# Altium PCB Tigershark 3D R1.3.PcbDoc (part 1 of 3)
Units mm, origin at the board's own origin, x right, y up, seen from the top; angles counter-clockwise.
Board outline 142.49 x 111.76 mm, 4 copper layers (Top Layer, Groun Plane, Power Plane, Bottom Layer); 253 components, 276 nets, 982 pads, 750 vias.
Unrouted connection lines stored in the file: 262.
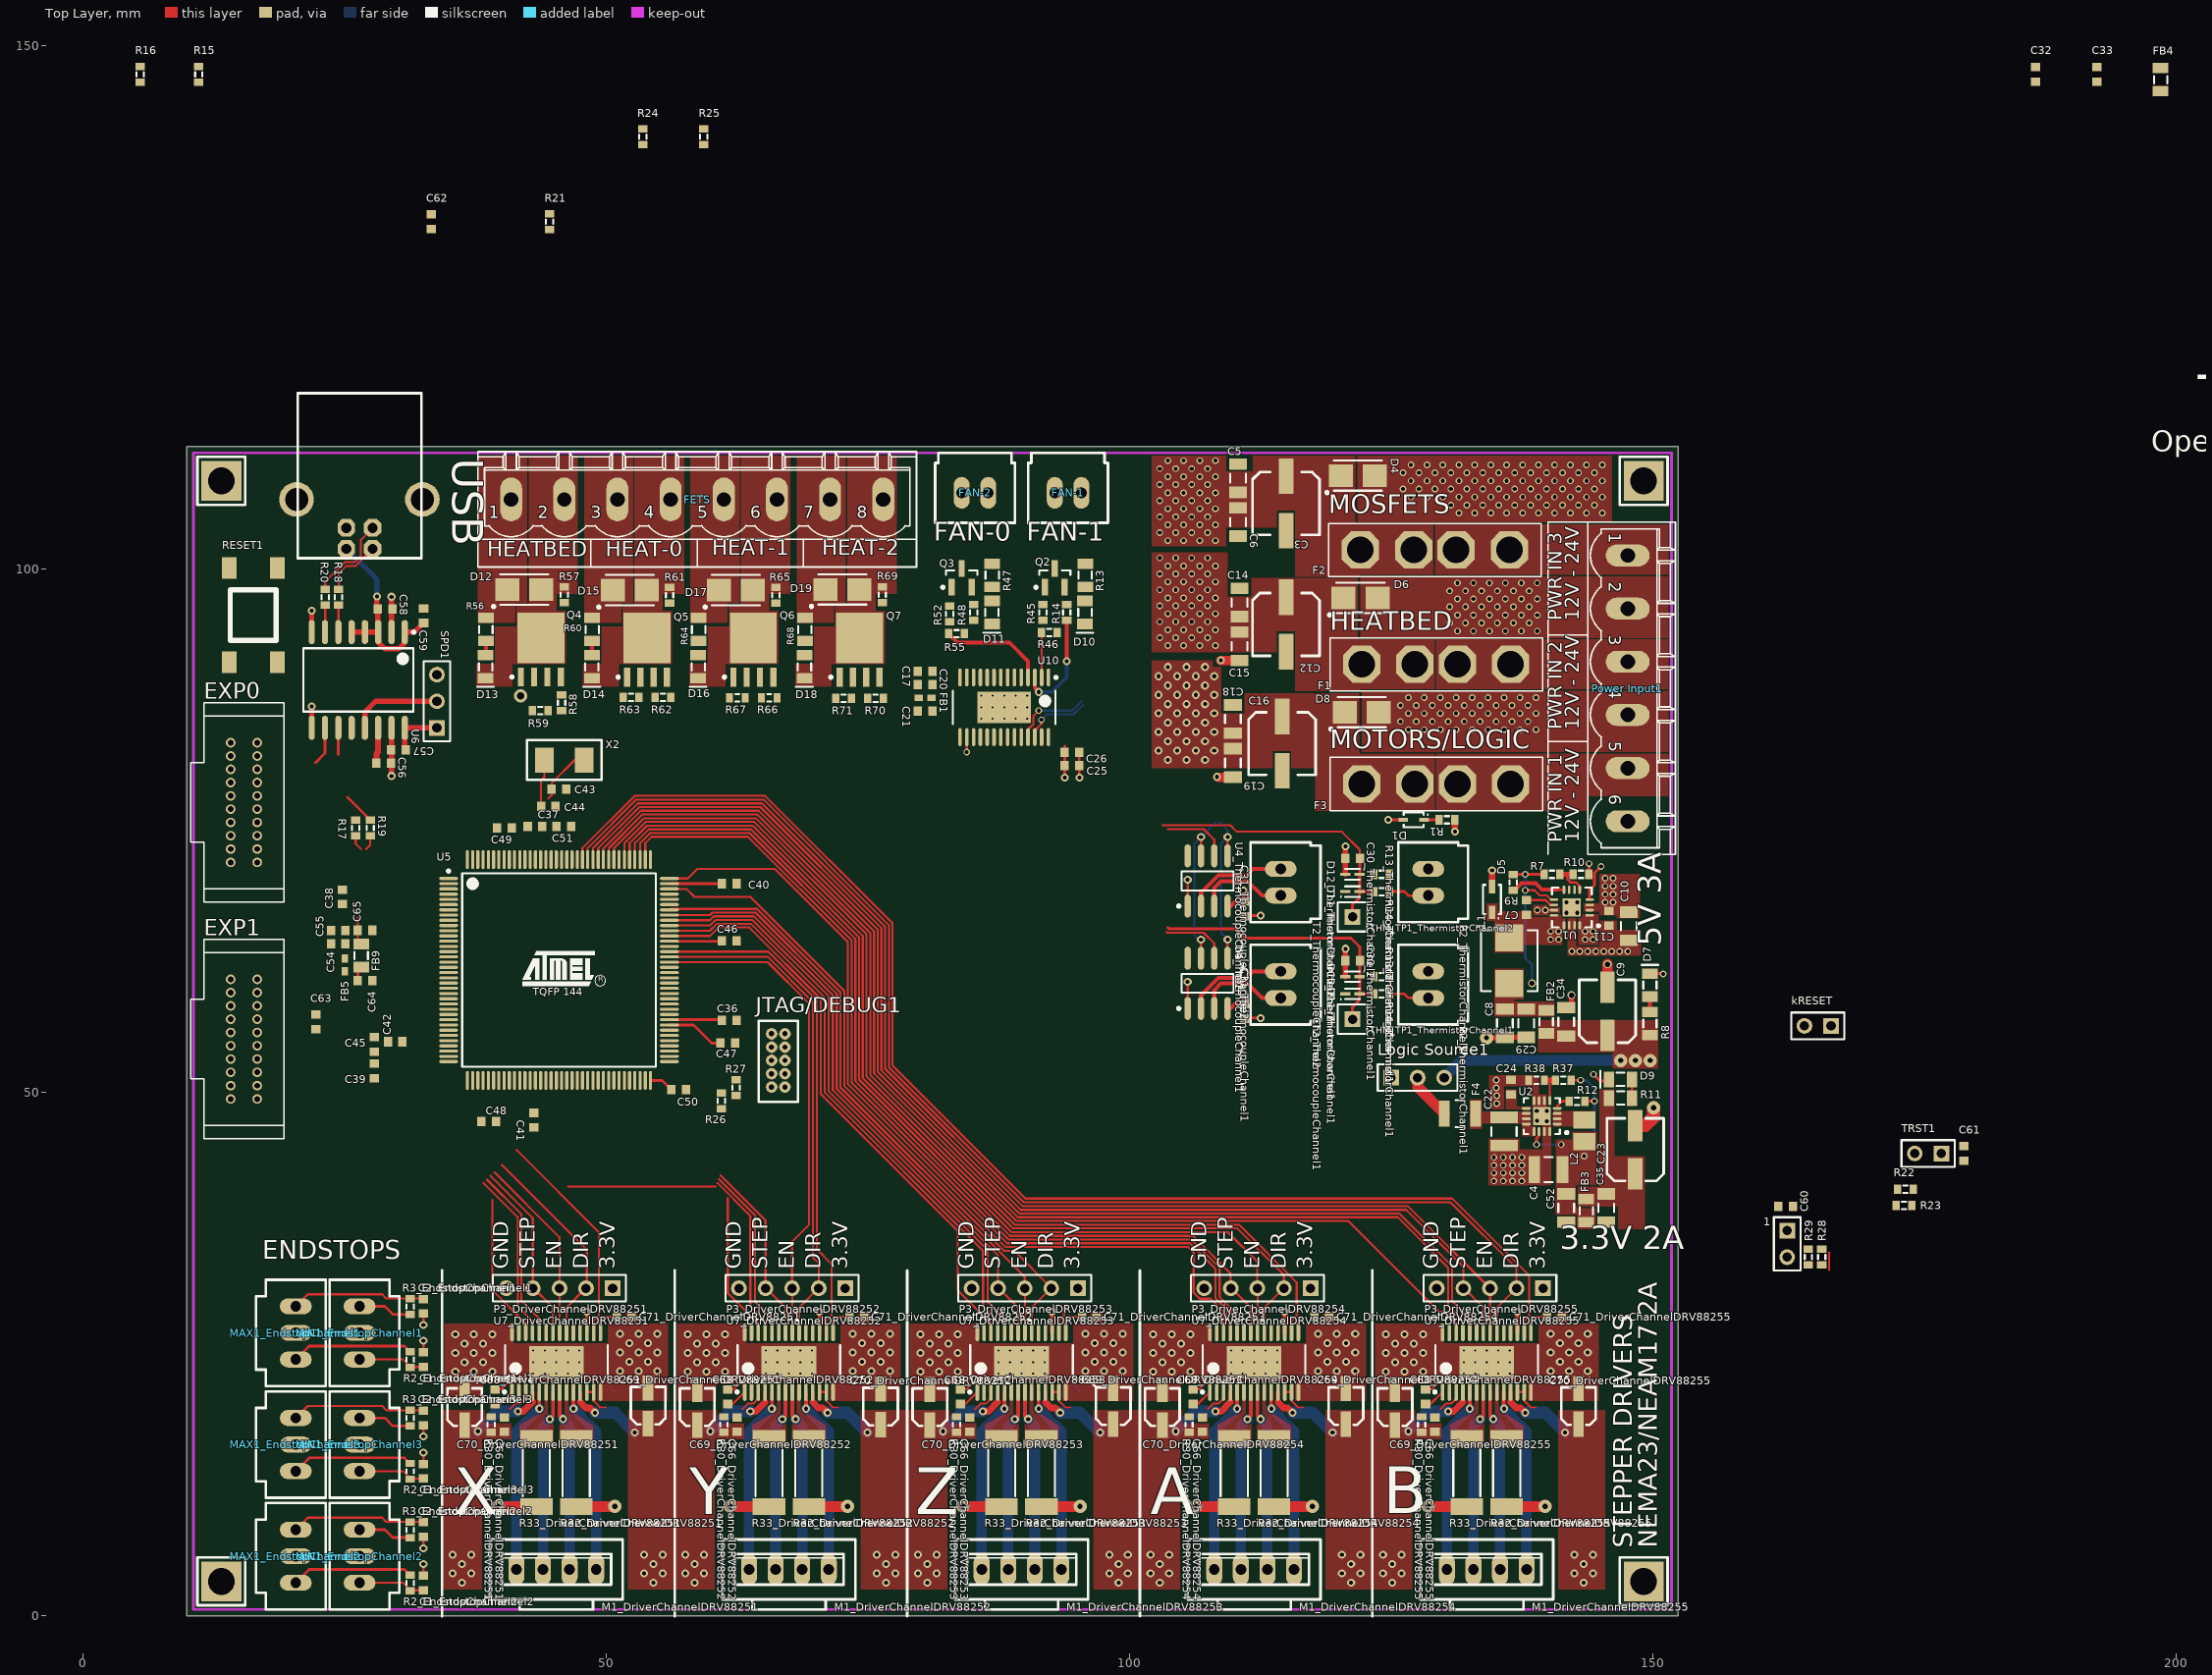
[diagram p0: Top Layer view]
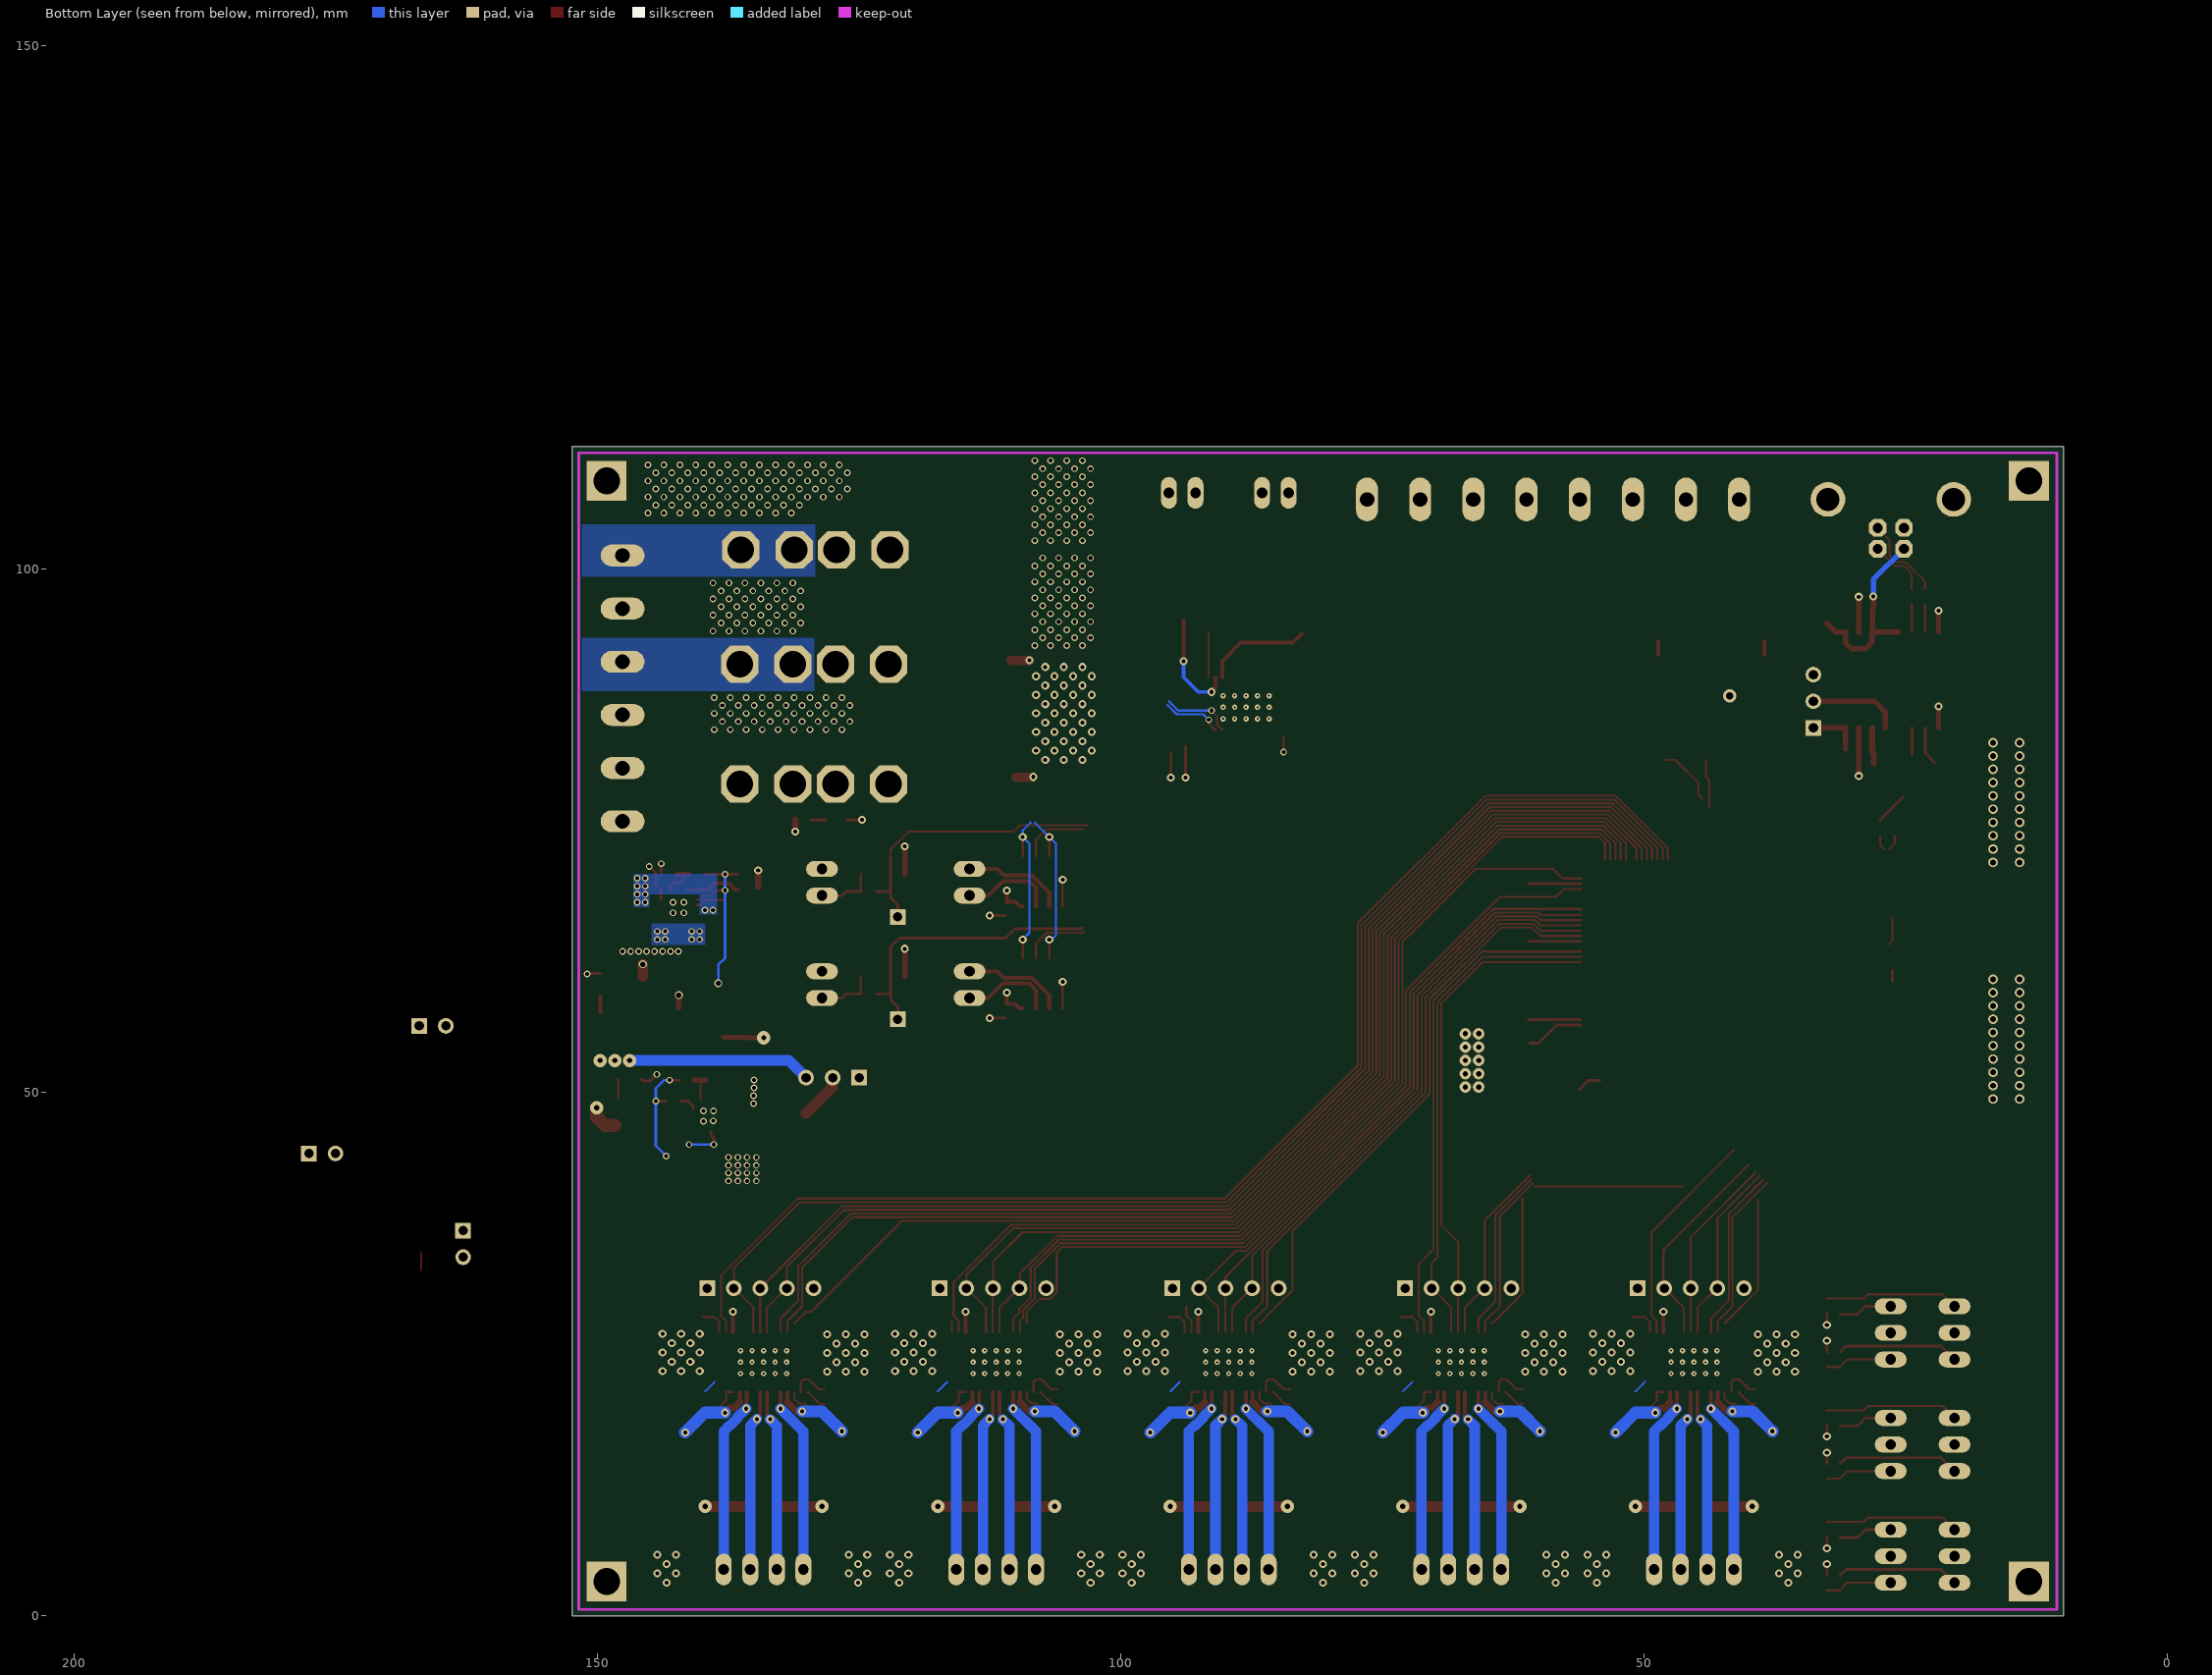
[diagram p1: Bottom Layer view, seen from below]
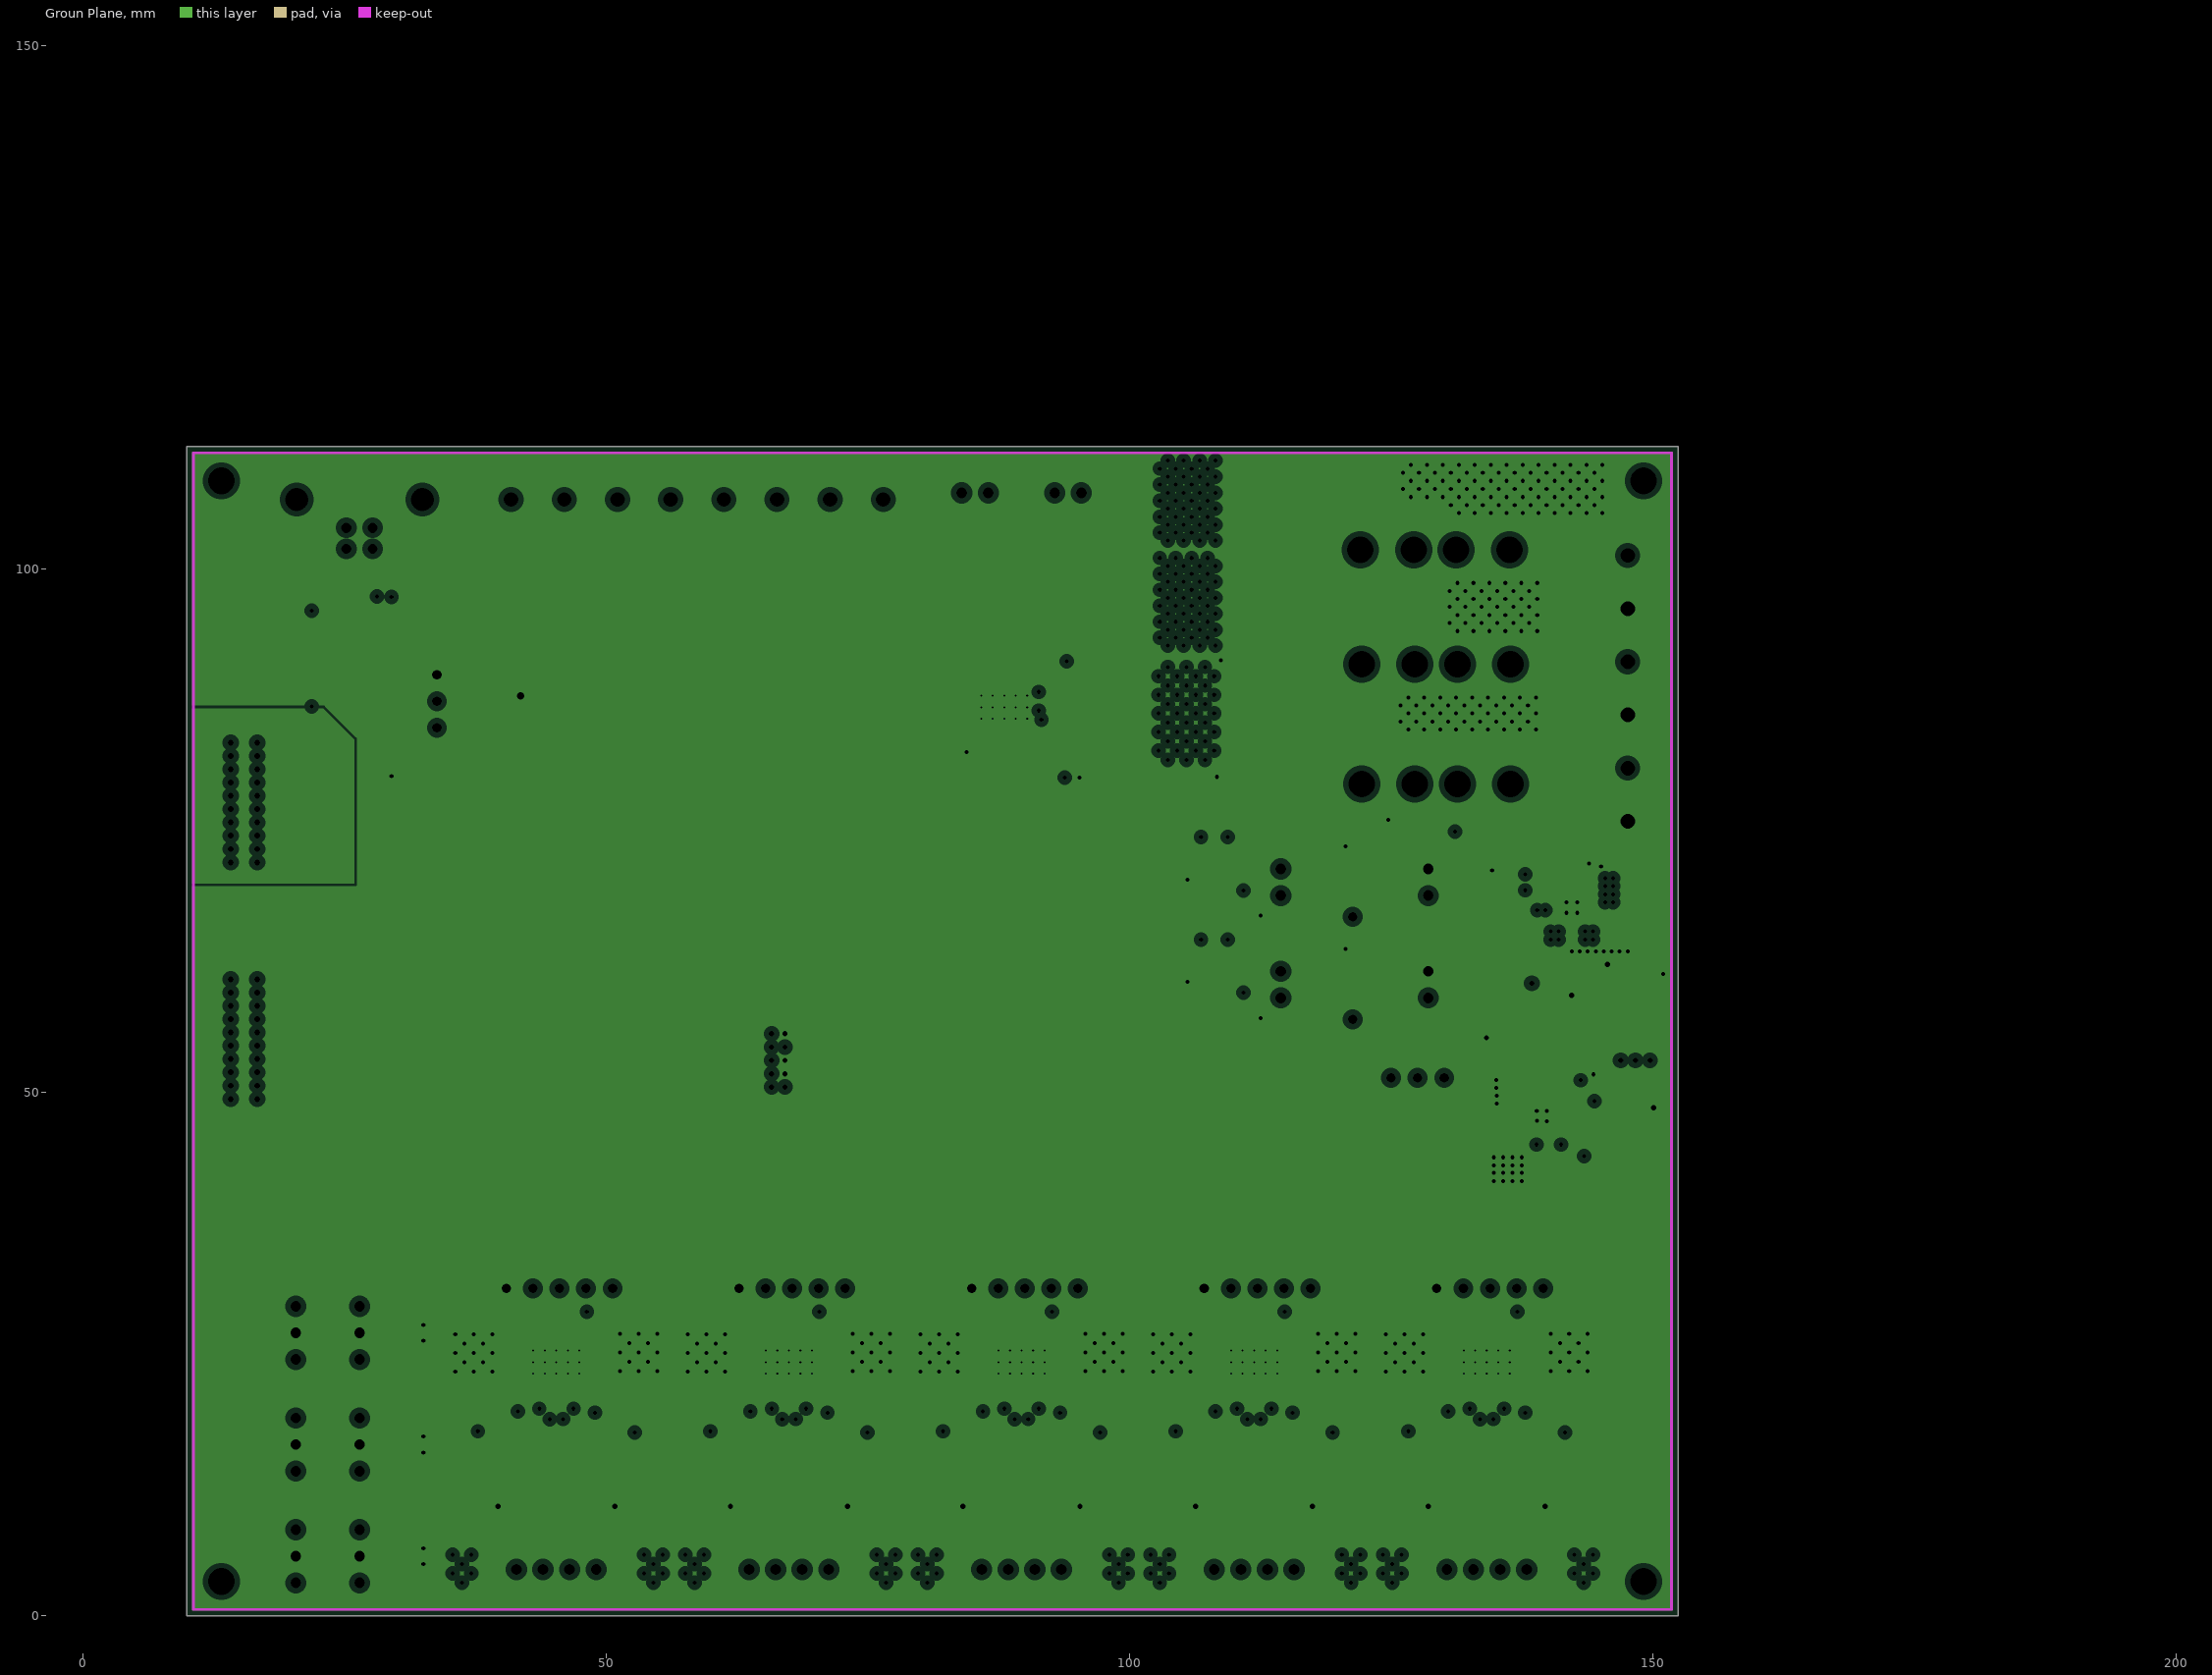
[diagram p2: Groun Plane, clearances drawn from the general rule]
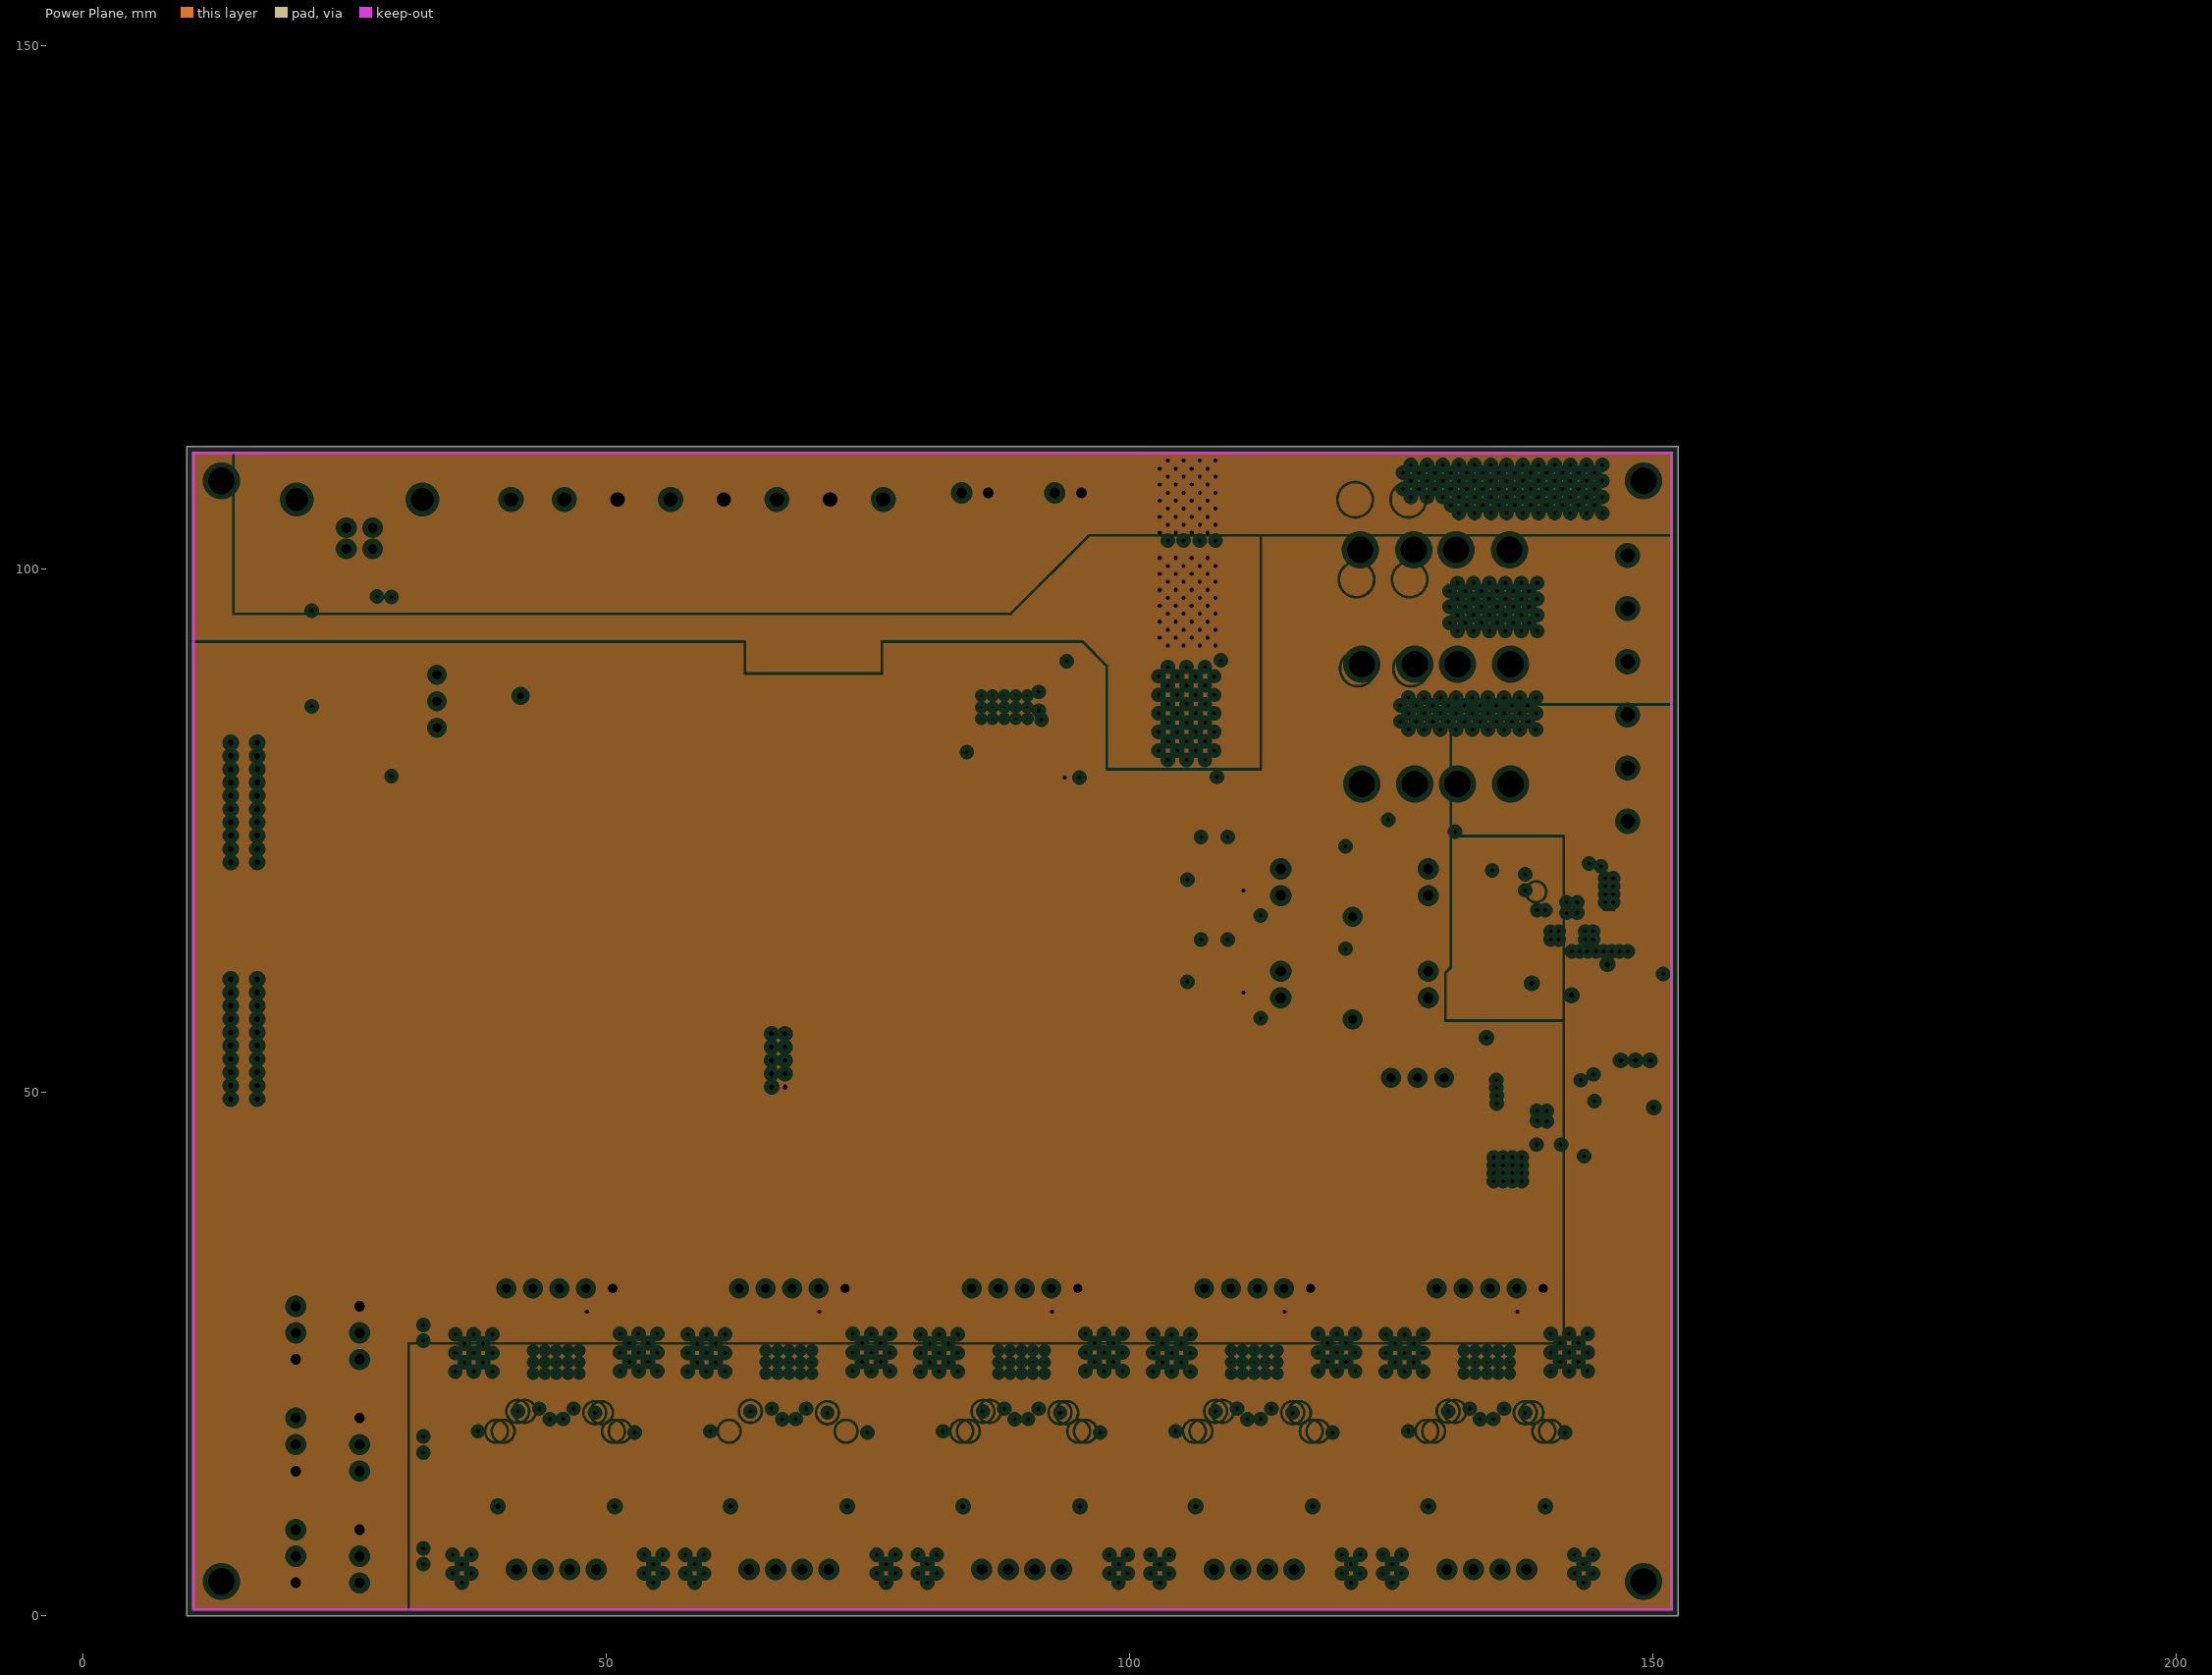
[diagram p3: Power Plane, clearances drawn from the general rule]

## Layer stack, top to bottom
Top Layer: signal copper 0.0356
Dielectric: core 0.32, FR-4, Dk 4.8
Groun Plane: plane copper 0.0356, net (Multiple Nets)
Dielectric: prepreg 0.32, FR-4, Dk 4.8
Power Plane: plane copper 0.0356, net (Multiple Nets)
Dielectric: core 0.32, FR-4, Dk 4.8
Bottom Layer: signal copper 0.0356

## Board outline
9.906,0 152.4,0 152.4,111.76 9.906,111.76

## Design rules (kind name [scope] priority, off if disabled: settings)
Clearance [All] p1: gap=0.152
ComponentClearance [All] p1: gap=0 collisioncheckmode=3 verticalgap=0.254 showdistances=FALSE
FanoutControl Fanout_SOIC [(InComponent('U8') AND InComponent('U7'))] p3: bgadir=Out bgaviamode=Centered fanoutstyle=Staggered fanoutdirection=Alternating viagrid=0.025 // Fanout_SOIC (Default Rule)
FanoutControl Fanout_Small [All] p4: bgadir=Out bgaviamode=Centered fanoutstyle=Auto fanoutdirection=Alternating viagrid=0.025 // Fanout_Small (Default Rule)
HoleSize [All] p1: absolutevalues=TRUE maxlimit=3.048 minlimit=0.025 maxpercent=80.000 minpercent=20.000
MinimumSolderMaskSliver [All] p1 off: minsoldermaskwidth=0.254
PlaneClearance [All] p1: clearance=0.508
PlaneConnect [All] p1: planeconnectstyle=Direct reliefexpansion=0.508 reliefentries=4 reliefconductorwidth=0.254 reliefairgap=0.254
PolygonConnect [All] p1: connectstyle=Direct reliefconductorwidth=1.143 reliefentries=4 polygonreliefangle="90 Angle" airgapwidth=0.254
RoomDefinition DriverChannelDRV88255 [InComponentClass('DriverChannelDRV88255')] p1: confinementstyle=ConfineIn formatcopy=TRUE lockcomponents=FALSE outline 123.19,0 145.415,0 145.415,33.02 123.19,33.02
RoomDefinition DriverChannelDRV88254 [InComponentClass('DriverChannelDRV88254')] p2: confinementstyle=ConfineIn formatcopy=TRUE lockcomponents=FALSE outline 100.965,0 123.19,0 123.19,33.02 100.965,33.02
RoomDefinition DriverChannelDRV88253 [InComponentClass('DriverChannelDRV88253')] p3: confinementstyle=ConfineIn formatcopy=TRUE lockcomponents=FALSE outline 78.74,0 100.965,0 100.965,33.02 78.74,33.02
RoomDefinition DriverChannelDRV88252 [InComponentClass('DriverChannelDRV88252')] p4: confinementstyle=ConfineIn formatcopy=TRUE lockcomponents=FALSE outline 56.515,0 78.74,0 78.74,33.02 56.515,33.02
RoomDefinition DriverChannelDRV88251 [InComponentClass('DriverChannelDRV88251')] p5: confinementstyle=ConfineIn formatcopy=TRUE lockcomponents=FALSE outline 34.29,0 56.515,0 56.515,33.02 34.29,33.02
RoutingVias [All] p1: holewidth=0.381 width=0.635 viastyle="Through Hole" minholewidth=0.381 minwidth=0.635 maxholewidth=0.711 maxwidth=1.27
SilkToSilkClearance [All] p1 off: silktosilkclearance=0.254
SilkToSolderMaskClearance SilkscreenOverComponentPads [IsPad] p1 off: minsilkscreentomaskgap=0.254 clearancetoexposedcopper=TRUE
SolderMaskExpansion [All] p1: expansion=0.102
Width [All] p1: maxlimit=5.08 minlimit=0.152 preferedwidth=0.152 minimp=50.000000 maximp=50.000000 favimp=50.000000
19 further rules are at their usual default settings.

## Classes and differential pairs
channel class "Thermistor Channel": ThermistorChannel1 ThermistorChannel2
component class ThermistorChannel2: C30_ThermistorChannel2 D11_ThermistorChannel2 D12_ThermistorChannel2 P2_ThermistorChannel2 R13_ThermistorChannel2 R14_ThermistorChannel2 THM_TP1_ThermistorChannel2
component class ThermistorChannel1: C30_ThermistorChannel1 D11_ThermistorChannel1 D12_ThermistorChannel1 P2_ThermistorChannel1 R13_ThermistorChannel1 R14_ThermistorChannel1 THM_TP1_ThermistorChannel1
net class THERM_ANBUS[1..2]: THERM_AN0
net class TC_CS_BUS[1..2]: TC_CS0
net class SCLK[1..2]: SCLK0 SCLK1 SCLK2
net class MISO[1..2]: MISO0 MISO1 MISO2
net class MIN_ES_BUS[1..3]: MIN_ES0
net class MAX_ES_BUS[1..3]: MAX_ES0
component class Designator: C3 C4 C5 C6 C7 C8 C9 C10 C11 C12 C14 C15 C16 C18 C19 C22 C23 C24 C29 C34 C35 C52 D1 D4 D5 D6 D7 D8 D9 F1 F2 F3 F4 FB2 FB3 L1 L2 "Logic Source1" "Power Input1" R1 R7 R8 R9 R10 R11 R12 R37 R38 U1 U2
component class "ATSAM4E16EA_AU Main Controller": 1 C32 C33 C36 C37 C38 C39 C40 C41 C42 C43 C44 C45 C46 C47 C48 C49 C50 C51 C54 C55 C56 C57 C58 C59 C60 C61 C62 C63 C64 C65 EXP1 FB4 FB5 FB9 JTAG/DEBUG1 kRESET R15 R16 R17 R18 R19 R20 R21 R22 R23 R24 R25 R26 R27 R28 R29 RESET1 SPD1 TRST1 U5 U6 USB X2
component class DriverChannelDRV88251: C66_DriverChannelDRV88251 C68_DriverChannelDRV88251 C69_DriverChannelDRV88251 C70_DriverChannelDRV88251 C71_DriverChannelDRV88251 M1_DriverChannelDRV88251 P3_DriverChannelDRV88251 R30_DriverChannelDRV88251 R32_DriverChannelDRV88251 R33_DriverChannelDRV88251 U7_DriverChannelDRV88251
component class DriverChannelDRV88252: C66_DriverChannelDRV88252 C68_DriverChannelDRV88252 C69_DriverChannelDRV88252 C70_DriverChannelDRV88252 C71_DriverChannelDRV88252 M1_DriverChannelDRV88252 P3_DriverChannelDRV88252 R30_DriverChannelDRV88252 R32_DriverChannelDRV88252 R33_DriverChannelDRV88252 U7_DriverChannelDRV88252
component class DriverChannelDRV88253: C66_DriverChannelDRV88253 C68_DriverChannelDRV88253 C69_DriverChannelDRV88253 C70_DriverChannelDRV88253 C71_DriverChannelDRV88253 M1_DriverChannelDRV88253 P3_DriverChannelDRV88253 R30_DriverChannelDRV88253 R32_DriverChannelDRV88253 R33_DriverChannelDRV88253 U7_DriverChannelDRV88253
component class DriverChannelDRV88254: C66_DriverChannelDRV88254 C68_DriverChannelDRV88254 C69_DriverChannelDRV88254 C70_DriverChannelDRV88254 C71_DriverChannelDRV88254 M1_DriverChannelDRV88254 P3_DriverChannelDRV88254 R30_DriverChannelDRV88254 R32_DriverChannelDRV88254 R33_DriverChannelDRV88254 U7_DriverChannelDRV88254
component class DriverChannelDRV88255: C66_DriverChannelDRV88255 C68_DriverChannelDRV88255 C69_DriverChannelDRV88255 C70_DriverChannelDRV88255 C71_DriverChannelDRV88255 M1_DriverChannelDRV88255 P3_DriverChannelDRV88255 R30_DriverChannelDRV88255 R32_DriverChannelDRV88255 R33_DriverChannelDRV88255 U7_DriverChannelDRV88255
component class EndstopChannel1: C1_EndstopChannel1 C2_EndstopChannel1 MAX1_EndstopChannel1 MIN1_EndstopChannel1 R2_EndstopChannel1 R3_EndstopChannel1
component class EndstopChannel2: C1_EndstopChannel2 C2_EndstopChannel2 MAX1_EndstopChannel2 MIN1_EndstopChannel2 R2_EndstopChannel2 R3_EndstopChannel2
component class EndstopChannel3: C1_EndstopChannel3 C2_EndstopChannel3 MAX1_EndstopChannel3 MIN1_EndstopChannel3 R2_EndstopChannel3 R3_EndstopChannel3
component class ThermocoupleChannel1: C31_ThermocoupleChannel1 T2_ThermocoupleChannel1 U4_ThermocoupleChannel1
component class ThermocoupleChannel2: C31_ThermocoupleChannel2 T2_ThermocoupleChannel2 U4_ThermocoupleChannel2
channel class "Driver Channel DRV8825": DriverChannelDRV88251 DriverChannelDRV88252 DriverChannelDRV88253 DriverChannelDRV88254 DriverChannelDRV88255
channel class "Endstop Channel": EndstopChannel1 EndstopChannel2 EndstopChannel3
channel class "Thermocouple Channel": ThermocoupleChannel1 ThermocoupleChannel2
component class "U_MOSFETs and Driver": C17 C20 C21 C25 C26 D10 D11 D12 D13 D14 D15 D16 D17 D18 D19 FAN-1 FAN-2 FB1 FETS Q2 Q3 Q4 Q5 Q6 Q7 R13 R14 R45 R46 R47 R48 R52 R55 R56 R57 R58 R59 R60 R61 R62 R63 R64 R65 R66 R67 R68 R69 R70 R71 U10

## Components (designator, comment, footprint, x,y, rotation, side; value= is the part's Value field where it differs from the comment)
1 "Header 2" HDR1X2 162.814,36.83 r270 top
C1_EndstopChannel1 "0603" 1608[0603] 32.512,24.499 r90 top (schematic designator C1)
C1_EndstopChannel2 "0603" 1608[0603] 32.512,3.163 r90 top (schematic designator C1)
C1_EndstopChannel3 "0603" 1608[0603] 32.512,13.831 r90 top (schematic designator C1)
C2_EndstopChannel1 "0603" 1608[0603] 32.512,29.591 r270 top (schematic designator C2)
C2_EndstopChannel2 "0603" 1608[0603] 32.512,8.255 r270 top (schematic designator C2)
C2_EndstopChannel3 "0603" 1608[0603] 32.512,18.923 r270 top (schematic designator C2)
C3 "VAS D" "Panasonic VS D" 114.935,106.299 r90 top
C4 "1210" C1210 140.009,42.658 r180 top
C5 "1206" C1206 110.363,108.712 r270 top
C6 "1206" C1206 110.363,104.521 r90 top
C7 "Cap Semi" 1608[0603] 137.922,67.691 r90 top
C8 "Cap Semi" C1206 135.839,56.642 r90 top
C9 "VS C" "Panasonic VS C" 142.723,60.833 r270 top
C10 "Cap Semi" C1206 147.701,65.913 r90 top
C11 "Cap Semi" 1608[0603] 145.796,66.675 r90 top
C12 "VAS D" "Panasonic VS D" 114.935,94.742 r90 top
C14 "1206" C1206 110.477,96.841 r270 top
C15 "1206" C1206 110.477,92.65 r90 top
C16 "VAS D" "Panasonic VS D" 114.554,83.35 r90 top
C17 "0603" 1608[0603] 80.449,90.253 r180 top
C18 "1206" C1206 109.855,85.703 r270 top
C19 "1206" C1206 109.855,81.512 r90 top
C20 "0603" 1608[0603] 80.449,88.983 r0 top
C21 "0603" 1608[0603] 80.449,86.443 r0 top
C22 "1210" C1210 135.768,46.29 r270 top
C23 "VS C" "Panasonic VS C" 145.39,47.611 r270 top
C24 "0603" 1608[0603] 136.428,50.532 r270 top
C25 "0603" 1608[0603] 94.484,81.236 r180 top
C26 "0603" 1608[0603] 94.484,82.506 r0 top
C29 "1206" C1206 137.897,56.642 r270 top
C30_ThermistorChannel1 "Cap Semi" 1608[0603] 121.285,62.611 r0 top (schematic designator C30)
C30_ThermistorChannel2 "Cap Semi" 1608[0603] 121.285,72.39 r0 top (schematic designator C30)
C31_ThermocoupleChannel1 "Cap Semi" 1608[0603] 110.998,57.772 r90 top (schematic designator C31)
C31_ThermocoupleChannel2 "Cap Semi" 1608[0603] 110.998,67.551 r90 top (schematic designator C31)
C32 "0603" 1608[0603] 186.563,147.308 r90 top
C33 "0603" 1608[0603] 192.405,147.308 r90 top
C34 "1206" C1206 141.707,56.769 r90 top
C35 "1206" C1206 145.517,38.989 r270 top
C36 "0603" 1608[0603] 61.722,56.896 r180 top
C37 "0603" 1608[0603] 43.18,75.438 r180 top
C38 "0603" 1608[0603] 24.765,68.707 r90 top
C39 "0603" 1608[0603] 27.813,52.07 r90 top
C40 "0603" 1608[0603] 61.722,69.977 r180 top
C41 "0603" 1608[0603] 43.053,47.371 r90 top
C42 "0603" 1608[0603] 29.817,54.873 r0 top
C43 "0603" 1608[0603] 45.466,78.994 r180 top
C44 "0603" 1608[0603] 44.45,77.343 r180 top
C45 "0603" 1608[0603] 27.813,54.61 r270 top
C46 "0603" 1608[0603] 61.722,64.516 r180 top
C47 "0603" 1608[0603] 61.595,54.737 r180 top
C48 "0603" 1608[0603] 38.735,47.244 r180 top
C49 "0603" 1608[0603] 40.259,75.311 r0 top
C50 "0603" 1608[0603] 56.896,50.292 r180 top
C51 "0603" 1608[0603] 45.946,75.447 r0 top
C52 "1206" C1206 141.707,38.989 r270 top
C54 "0603" 1608[0603] 24.375,64.234 r0 top
C55 "0603" 1608[0603] 24.375,65.504 r0 top
C56 "0603" 1608[0603] 28.727,81.483 r180 top
C57 "0603" 1608[0603] 30.124,82.753 r0 top
C58 "0603" 1608[0603] 28.854,96.215 r180 top
C59 "0603" 1608[0603] 32.537,95.58 r270 top
C60 "Cap Semi" 1608[0603] 162.687,39.116 r180 top
C61 "Cap Semi" 1608[0603] 179.705,44.196 r90 top
C62 "Cap Semi" 1608[0603] 33.274,133.211 r90 top
C63 "Cap Semi" 1608[0603] 22.225,56.769 r90 top
C64 "0603" 1608[0603] 26.942,60.692 r180 top
C65 "0603" 1608[0603] 26.942,65.518 r180 top
C66_DriverChannelDRV88251 "0603" 1608[0603] 40.259,18.288 r90 top (schematic designator C66)
C66_DriverChannelDRV88252 "0603" 1608[0603] 62.484,18.288 r90 top (schematic designator C66)
C66_DriverChannelDRV88253 "0603" 1608[0603] 84.709,18.288 r90 top (schematic designator C66)
C66_DriverChannelDRV88254 "0603" 1608[0603] 106.934,18.288 r90 top (schematic designator C66)
C66_DriverChannelDRV88255 "0603" 1608[0603] 129.159,18.288 r90 top (schematic designator C66)
C68_DriverChannelDRV88251 "0603" 1608[0603] 39.37,20.955 r90 top (schematic designator C68)
C68_DriverChannelDRV88252 "0603" 1608[0603] 61.595,20.955 r90 top (schematic designator C68)
C68_DriverChannelDRV88253 "0603" 1608[0603] 83.82,20.955 r90 top (schematic designator C68)
C68_DriverChannelDRV88254 "0603" 1608[0603] 106.045,20.955 r90 top (schematic designator C68)
C68_DriverChannelDRV88255 "0603" 1608[0603] 128.27,20.955 r90 top (schematic designator C68)
C69_DriverChannelDRV88251 "VS B" "Panasonic VS B" 52.327,21.858 r270 top (schematic designator C69)
C69_DriverChannelDRV88252 "VS B" "Panasonic VS B" 57.023,21.717 r270 top (schematic designator C69)
C69_DriverChannelDRV88253 "VS B" "Panasonic VS B" 96.776,21.811 r270 top (schematic designator C69)
C69_DriverChannelDRV88254 "VS B" "Panasonic VS B" 119.001,21.811 r270 top (schematic designator C69)
C69_DriverChannelDRV88255 "VS B" "Panasonic VS B" 123.698,21.717 r270 top (schematic designator C69)
C70_DriverChannelDRV88251 "VS B" "Panasonic VS B" 34.798,21.717 r270 top (schematic designator C70)
C70_DriverChannelDRV88252 "VS B" "Panasonic VS B" 74.55,21.764 r270 top (schematic designator C70)
C70_DriverChannelDRV88253 "VS B" "Panasonic VS B" 79.248,21.717 r270 top (schematic designator C70)
C70_DriverChannelDRV88254 "VS B" "Panasonic VS B" 101.473,21.717 r270 top (schematic designator C70)
C70_DriverChannelDRV88255 "VS B" "Panasonic VS B" 141.226,21.811 r270 top (schematic designator C70)
C71_DriverChannelDRV88251 "0603" 1608[0603] 51.689,28.575 r180 top (schematic designator C71)
C71_DriverChannelDRV88252 "0603" 1608[0603] 73.914,28.575 r180 top (schematic designator C71)
C71_DriverChannelDRV88253 "0603" 1608[0603] 96.139,28.575 r180 top (schematic designator C71)
C71_DriverChannelDRV88254 "0603" 1608[0603] 118.364,28.575 r180 top (schematic designator C71)
C71_DriverChannelDRV88255 "0603" 1608[0603] 140.589,28.575 r180 top (schematic designator C71)
D1 "SZMM3Z4V7T1G" SZMM3Z4V7T1G 127.127,76.073 r0 top
D4 "SK310A-TP" SK310A-TP 121.793,108.966 r180 top
D5 "PMEG1030EH_EJ" PMEG1030EH_EJ 134.62,68.453 r270 top
D6 "SK310A-TP" SK310A-TP 122.047,97.282 r180 top
D7 "LED2" "SM 0805 polarized" 150.812,62.312 r270 top
D8 "SK310A-TP" SK310A-TP 122.174,86.36 r180 top
D9 "LED2" "SM 0805 polarized" 144.861,52.386 r0 top
D10 "LED1" "SM 0805 polarized" 94.615,93.853 r90 top
D11 "LED1" "SM 0805 polarized" 85.725,93.853 r90 top
D11_ThermistorChannel1 "Diode 1N4148" 1N4148WT 121.285,59.436 r180 top (schematic designator D11)
D11_ThermistorChannel2 "Diode 1N4148" 1N4148WT 121.285,69.215 r180 top (schematic designator D11)
D12 "B240A-13-F" SK310A-TP 42.164,98.071 r180 top
D12_ThermistorChannel1 "Diode 1N4148" 1N4148WT 121.285,61.087 r0 top (schematic designator D12)
D12_ThermistorChannel2 "Diode 1N4148" 1N4148WT 121.285,70.866 r0 top (schematic designator D12)
D13 "LED1" "SM 0805 polarized" 37.338,88.673 r90 top
D14 "LED1" "SM 0805 polarized" 47.498,88.673 r90 top
D15 "B240A-13-F" SK310A-TP 52.222,98.02 r180 top
D16 "LED1" "SM 0805 polarized" 57.658,88.673 r90 top
D17 "B240A-13-F" SK310A-TP 62.382,98.02 r180 top
D18 "LED1" "SM 0805 polarized" 67.818,88.673 r90 top
D19 "B240A-13-F" SK310A-TP 72.542,98.087 r180 top
EXP0 "10X2-0.1X0.05" 10X2-0.05X0.1 15.367,77.724 r90 top
EXP1 "10X2-0.1X0.05" 10X2-0.05X0.1 15.367,55.118 r90 top
F1 "3522-2" 3522-2 129.286,90.932 r180 top
F2 "3522-2" 3522-2 129.159,101.854 r180 top
F3 "3522-2" 3522-2 129.286,79.502 r180 top
F4 "LittleFuse F1210" F1210_M 131.547,48.006 r180 top
FAN-1 "Molex 70543-02" 70543-02 94.107,107.315 r180 top
FAN-2 "Molex 70543-02" 70543-02 85.217,107.315 r180 top
FB1 "BLM15HG601SN1D" BLM18PG121SN1D 80.449,87.713 r180 top
FB2 "MH2029-300Y" "SM 0805 - gap trimmed" 139.802,56.769 r270 top
FB3 "MH2029-300Y" "SM 0805 - gap trimmed" 143.612,38.735 r90 top
FB4 "MH2029-300Y" "SM 0805 - gap trimmed" 198.501,146.8 r90 top
FB5 "BLM15HG601SN1D" BLM18PG121SN1D 25.01,62.202 r90 top
FB9 "MH2029-300Y" "SM 0805 - gap trimmed" 26.561,63.105 r90 top
FETS "con-phoenix-508 - 8" MSTBV4 58.674,106.68 r90 top
JTAG/DEBUG1 "S9015E-05-ND" S9015E-05-ND 67.056,55.626 r270 top
kRESET "Header 2" HDR1X2 167.005,56.388 r180 top
L1 "Inductor" CIP0530LR3R3 136.271,62.611 r270 top
L2 "VLS252012T-2R2M1R3" VLS252012T-2R2M1R3 143.438,46.366 r270 top
"Logic Source1" "Header 3" HDR1X3 124.968,51.435 r0 top
M1_DriverChannelDRV88251 "Molex 0705430003" 4POL254 45.212,4.445 r0 top (schematic designator M1)
M1_DriverChannelDRV88252 "Molex 0705430003" 4POL254 67.437,4.445 r0 top (schematic designator M1)
M1_DriverChannelDRV88253 "Molex 0705430003" 4POL254 89.662,4.445 r0 top (schematic designator M1)
M1_DriverChannelDRV88254 "Molex 0705430003" 4POL254 111.887,4.445 r0 top (schematic designator M1)
M1_DriverChannelDRV88255 "Molex 0705430003" 4POL254 134.112,4.445 r0 top (schematic designator M1)
MAX1_EndstopChannel1 "Molex 70543-03" 70543-03 20.32,27.051 r270 top (schematic designator MAX1)
MAX1_EndstopChannel2 "Molex 70543-03" 70543-03 20.32,5.715 r270 top (schematic designator MAX1)
MAX1_EndstopChannel3 "Molex 70543-03" 70543-03 20.32,16.383 r270 top (schematic designator MAX1)
MIN1_EndstopChannel1 "Molex 70543-03" 70543-03 26.416,27.051 r90 top (schematic designator MIN1)
MIN1_EndstopChannel2 "Molex 70543-03" 70543-03 26.416,5.715 r90 top (schematic designator MIN1)
MIN1_EndstopChannel3 "Molex 70543-03" 70543-03 26.416,16.383 r90 top (schematic designator MIN1)
P2_ThermistorChannel1 "Molex 70543-02" 70543-02 128.524,60.325 r90 top (schematic designator P2)
P2_ThermistorChannel2 "Molex 70543-02" 70543-02 128.524,70.104 r90 top (schematic designator P2)
P3_DriverChannelDRV88251 "Header 5" HDR1X5 50.597,31.318 r180 top (schematic designator P3)
P3_DriverChannelDRV88252 "Header 5" HDR1X5 72.822,31.318 r180 top (schematic designator P3)
P3_DriverChannelDRV88253 "Header 5" HDR1X5 95.047,31.318 r180 top (schematic designator P3)
P3_DriverChannelDRV88254 "Header 5" HDR1X5 117.272,31.318 r180 top (schematic designator P3)
P3_DriverChannelDRV88255 "Header 5" HDR1X5 139.497,31.318 r180 top (schematic designator P3)
"Power Input1" "con-phoenix-508" MSTBV6 147.574,101.333 r0 top
Q2 "IRML6346TRPBF" IRLML6346 92.837,99.187 r90 top
Q3 "IRML6346TRPBF" IRLML6346 83.947,99.187 r90 top
Q4 "PSMN7R0-60YS" PSMN7R0-60YS 43.726,92.315 r90 top
Q5 "PSMN7R0-60YS" PSMN7R0-60YS 53.873,92.305 r90 top
Q6 "PSMN7R0-60YS" PSMN7R0-60YS 64.033,92.305 r90 top
Q7 "PSMN7R0-60YS" PSMN7R0-60YS 74.193,92.305 r90 top
R1 "Res3" J1-0603 130.302,76.073 r0 top
R2_EndstopChannel1 "0603" J1-0603 31.242,24.499 r270 top (schematic designator R2)
R2_EndstopChannel2 "0603" J1-0603 31.242,3.163 r270 top (schematic designator R2)
R2_EndstopChannel3 "0603" J1-0603 31.242,13.831 r270 top (schematic designator R2)
R3_EndstopChannel1 "0603" J1-0603 31.242,29.579 r90 top (schematic designator R3)
R3_EndstopChannel2 "0603" J1-0603 31.242,8.243 r90 top (schematic designator R3)
R3_EndstopChannel3 "0603" J1-0603 31.242,18.911 r90 top (schematic designator R3)
R7 "Res3" J1-0603 140.335,70.866 r180 top
R8 "Res3" "SM 0805 - gap trimmed" 149.708,56.597 r270 top
R9 "Res3" J1-0603 136.652,70.104 r270 top
R10 "Res3" J1-0603 143.129,70.866 r180 top
R11 "Res3" "SM 0805 - gap trimmed" 146.893,49.491 r180 top
R12 "0603" J1-0603 142.727,49.186 r0 top
R13 "0805" "SM 0805 - gap trimmed" 95.758,99.441 r270 top
R13_ThermistorChannel1 "Res3" J1-0603 124.079,61.087 r180 top (schematic designator R13)
R13_ThermistorChannel2 "Res3" J1-0603 124.079,70.866 r180 top (schematic designator R13)
R14 "0603" J1-0603 93.98,95.885 r90 top
R14_ThermistorChannel1 "Res3" J1-0603 124.079,59.436 r0 top (schematic designator R14)
R14_ThermistorChannel2 "Res3" J1-0603 124.079,69.215 r0 top (schematic designator R14)
R15 "0603" J1-0603 11.049,147.308 r90 top
R16 "0603" J1-0603 5.461,147.308 r90 top
R17 "0603" J1-0603 26.035,75.311 r90 top
R18 "0603" J1-0603 24.409,97.358 r90 top
R19 "0603" J1-0603 27.432,75.311 r90 top
R20 "0603" J1-0603 23.139,97.358 r90 top
R21 "Res3" J1-0603 44.577,133.211 r90 top
R22 "0603" J1-0603 174.117,40.767 r0 top
R23 "Res3" J1-0603 173.99,39.243 r0 top
R24 "0603" J1-0603 53.467,141.339 r90 top
R25 "0603" J1-0603 59.309,141.339 r90 top
R26 "0603" J1-0603 60.981,49.226 r90 top
R27 "0603" J1-0603 62.378,50.496 r90 top
R28 "0603" J1-0603 166.116,34.29 r270 top
R29 "0603" J1-0603 164.846,34.29 r270 top
R30_DriverChannelDRV88251 "0603" J1-0603 38.989,18.288 r90 top (schematic designator R30)
R30_DriverChannelDRV88252 "0603" J1-0603 61.214,18.288 r90 top (schematic designator R30)
R30_DriverChannelDRV88253 "0603" J1-0603 83.439,18.288 r90 top (schematic designator R30)
R30_DriverChannelDRV88254 "0603" J1-0603 105.664,18.288 r90 top (schematic designator R30)
R30_DriverChannelDRV88255 "0603" J1-0603 127.889,18.288 r90 top (schematic designator R30)
R32_DriverChannelDRV88251 "2512" Resistor2512 47.117,13.716 r90 top (schematic designator R32)
R32_DriverChannelDRV88252 "2512" Resistor2512 69.342,13.716 r90 top (schematic designator R32)
R32_DriverChannelDRV88253 "2512" Resistor2512 91.567,13.716 r90 top (schematic designator R32)
R32_DriverChannelDRV88254 "2512" Resistor2512 113.792,13.716 r90 top (schematic designator R32)
R32_DriverChannelDRV88255 "2512" Resistor2512 136.017,13.716 r90 top (schematic designator R32)
R33_DriverChannelDRV88251 "2512" Resistor2512 43.307,13.716 r90 top (schematic designator R33)
R33_DriverChannelDRV88252 "2512" Resistor2512 65.532,13.716 r90 top (schematic designator R33)
R33_DriverChannelDRV88253 "2512" Resistor2512 87.757,13.716 r90 top (schematic designator R33)
R33_DriverChannelDRV88254 "2512" Resistor2512 109.982,13.716 r90 top (schematic designator R33)
R33_DriverChannelDRV88255 "2512" Resistor2512 132.207,13.716 r90 top (schematic designator R33)
R37 "0603" J1-0603 141.406,51.192 r0 top
R38 "0603" J1-0603 138.866,51.192 r0 top
R45 "0603" J1-0603 91.694,95.885 r90 top
R46 "0603" J1-0603 92.329,93.98 r0 top
R47 "0805" "SM 0805 - gap trimmed" 86.868,99.441 r270 top
R48 "0603" J1-0603 85.09,95.885 r90 top
R52 "0603" J1-0603 82.804,95.758 r90 top
R55 "0603" J1-0603 83.439,93.853 r0 top
R56 "0805" "SM 0805 - gap trimmed" 38.481,94.261 r90 top
R57 "0603" J1-0603 45.974,97.563 r90 top
R58 "0603" J1-0603 45.72,87.276 r90 top
R59 "0603" J1-0603 43.688,86.514 r180 top
R60 "0805" "SM 0805 - gap trimmed" 48.641,94.261 r90 top
R61 "0603" J1-0603 56.032,97.512 r90 top
R62 "0603" J1-0603 55.397,87.774 r0 top
R63 "0603" J1-0603 52.349,87.774 r180 top
R64 "0805" "SM 0805 - gap trimmed" 58.801,94.261 r90 top
R65 "0603" J1-0603 66.192,97.512 r90 top
R66 "0603" J1-0603 65.557,87.733 r0 top
R67 "0603" J1-0603 62.509,87.733 r180 top
R68 "0805" "SM 0805 - gap trimmed" 68.961,94.261 r90 top
R69 "0603" J1-0603 76.352,97.579 r90 top
R70 "0603" J1-0603 75.717,87.673 r0 top
R71 "0603" J1-0603 72.669,87.673 r180 top
RESET1 "Tactile Switch" TL3301 16.256,95.631 r0 top
SPD1 "Header 3" HDR1X3 33.804,84.858 r90 top
T2_ThermocoupleChannel1 "Molex 70543-02" 70543-02 114.427,60.325 r90 top (schematic designator T2)
T2_ThermocoupleChannel2 "Molex 70543-02" 70543-02 114.427,70.104 r90 top (schematic designator T2)
THM_TP1_ThermistorChannel1 "TP4" PIN1 121.285,57.023 r90 top (schematic designator THM_TP1)
THM_TP1_ThermistorChannel2 "TP4" PIN1 121.285,66.802 r90 top (schematic designator THM_TP1)
TRST1 "Header 2" HDR1X2 177.546,44.196 r180 top
U1 "MIC24085" MIC24085-AYML 142.24,67.691 r180 top
U2 "TPS62142RGTT" RGT16-1700X1700TP 139.374,47.763 r180 top
U4_ThermocoupleChannel1 "MAX31855EASA+" MAXM-S8+4_N 107.442,60.452 r90 top (schematic designator U4)
U4_ThermocoupleChannel2 "MAX31855EASA+" MAXM-S8+4_N 107.442,70.231 r90 top (schematic designator U4)
U5 "ATSAM4E16EA-AU" LQFP144_N 45.466,61.722 r0 top
U6 "ADuM4160" ADuM4160 26.289,89.433 r270 top
U7_DriverChannelDRV88251 "DRV8825" DRV8825 45.212,24.257 r90 top (schematic designator U7)
U7_DriverChannelDRV88252 "DRV8825" DRV8825 67.437,24.257 r90 top (schematic designator U7)
U7_DriverChannelDRV88253 "DRV8825" DRV8825 89.662,24.257 r90 top (schematic designator U7)
U7_DriverChannelDRV88254 "DRV8825" DRV8825 111.887,24.257 r90 top (schematic designator U7)
U7_DriverChannelDRV88255 "DRV8825" DRV8825 134.112,24.257 r90 top (schematic designator U7)
U10 "Allegro A3944" "A3944 28 Pin TSSOP" 88.007,86.824 r270 top
USB "USB-B" PN61729 26.416,106.68 r180 top
X2 "445C35A12M00000" 445C35A12M00000 47.879,81.788 r180 top

## Footprints (in the part's own frame and the unit in brackets; to place one, negate y for a bottom-side part, rotate by r counter-clockwise, add the part's x,y. Pads: shape width x height; smd on the part's side, far side on the other; paste and mask are expansions set on the pad)
1N4148WT [mm] "Molded Diode, 2-Leads, Body 1.20x0.80mm, IPC Medium Density"
  rect 1x0.3 smd: 1(-0.675,0) 2(0.675,0)
  silkscreen extent -0.7,-0.5 1.15,0.55, body extent -0.65,-0.45 0.65,0.45, height 0.7
4POL254 [mil]
  oval 60x120 hole 40: 1(-150,0) 2(-50,0) 3(50,0) 4(150,0)
  silkscreen extent -250,-150 250,113, body extent -250,-150 250,113, height 454
10X2-0.05X0.1 [mil]
  round 36 hole 22: 1(225,50) 2(175,50) 3(125,50) 4(75,50) 5(25,50) 6(-25,50) 7(-75,50) 8(-125,50) 9(-175,50) 10(-225,50) 11(-225,-50) 12(-175,-50) 13(-125,-50) 14(-75,-50) 15(-25,-50) 16(25,-50) 17(75,-50) 18(125,-50) 18(175,-50) 18(225,-50)
  silkscreen extent -375,-150 375,200, body extent -375,-150 375,200, height 591
445C35A12M00000 [mm] "Crystal Oscillator"
  rect 1.8x2.4 smd: 1(0,0) 2(3.8,0)
  silkscreen extent -1.65,-1.9 5.46,1.91, body extent -1.27,-1.52 5.08,1.52, height 1
1608[0603] [mm] "Chip Capacitor, Body 1.6x0.8mm, IPC High Density"
  rect 0.8x0.9 smd: 1(-0.7,0) 2(0.7,0)
  body extent -0.87,-0.48 0.87,0.48, height 1.3
3522-2 [mil] "3522-2"
  oct 140x140 hole 100: 1(-280,0) 1(-80,0) 2(80,0) 2(280,0)
  silkscreen extent -400,-100 400,100, body extent -402,-103 402,103, height 299
70543-02 [mil]
  oval 60x120 hole 40: 1(-50,0) 2(50,0)
  silkscreen extent -150,-150 150,113, body extent -150,-150 150,113, height 450
70543-03 [mil]
  oval 60x120 hole 40: 1(-100,0) 2(0,0) 3(100,0)
  silkscreen extent -200,-150 200,113, body extent -200,-150 200,113, height 450
"A3944 28 Pin TSSOP" [mm] "TSOP, 28-Leads, Body 9.70x4.40mm, Pitch 0.65mm, Thermal Pad 5.08.2x3.00.2mm, IPC Medium Density"
  oval 1.7x0.35 smd: 1(-2.85,4.225) 2(-2.85,3.575) 3(-2.85,2.925) 4(-2.85,2.275) 5(-2.85,1.625) 6(-2.85,0.975) 7(-2.85,0.325) 8(-2.85,-0.325) 9(-2.85,-0.975) 10(-2.85,-1.625) 11(-2.85,-2.275) 12(-2.85,-2.925) 13(-2.85,-3.575) 14(-2.85,-4.225) 15(2.85,-4.225) 16(2.85,-3.575) 17(2.85,-2.925) 18(2.85,-2.275) 19(2.85,-1.625) 20(2.85,-0.975) 21(2.85,-0.325) 22(2.85,0.325) 23(2.85,0.975) 24(2.85,1.625) 25(2.85,2.275) 26(2.85,2.925) 27(2.85,3.575) 28(2.85,4.225)
  rect 3x5.08 smd: 29(0,0)
  silkscreen extent -2.97,-4.9 1.6,5.08, body extent -2.25,-4.9 2.25,4.9, height 1.2
ADuM4160 [mm] "SOIC, 16-Leads, Body 10.30x7.50mm, Pitch 1.27mm, IPC Medium Density"
  oval 2.3x0.6 smd: 1(-4.575,4.445) 2(-4.575,3.175) 3(-4.575,1.905) 4(-4.575,0.635) 5(-4.575,-0.635) 6(-4.575,-1.905) 7(-4.575,-3.175) 8(-4.575,-4.445) 9(4.575,-4.445) 10(4.575,-3.175) 11(4.575,-1.905) 12(4.575,-0.635) 13(4.575,0.635) 14(4.575,1.905) 15(4.575,3.175) 16(4.575,4.445)
  silkscreen extent -4.7,-5.25 3.03,5.42, body extent -3.8,-5.25 3.8,5.25, height 2.65
BLM18PG121SN1D [mm] "Chip Inductor, 2-Leads, Body 1.0x0.5mm, IPC Medium Density"
  rect 0.8x0.6 smd: 1(-0.6,0) 2(0.6,0)
  body extent -0.52,-0.28 0.53,0.27, height 0.6
C1206 [mm] "Chip Capacitor, Body 3.2x1.6mm, IPC High Density"
  rect 1.1x1.7 smd: 1(-1.35,0) 2(1.35,0)
  silkscreen extent -0.4,-0.75 0.4,0.75, body extent -1.7,-0.9 1.7,0.9, height 1.3
C1210 [mm] "Chip Capacitor, Body 3.2x2.5mm, IPC High Density"
  rect 1.1x2.6 smd: 1(-1.35,0) 2(1.35,0)
  silkscreen extent -0.4,-1.2 0.4,1.2, body extent -1.7,-1.35 1.7,1.35, height 1.3
CIP0530LR3R3 [mm] "Precision Wire Wound Inductor, 2-Leads, Body 5.58x5.30mm, IPC Medium Density"
  rect 2.55x2.7 smd: 1(-2.175,0) 2(2.175,0)
  silkscreen extent -2.9,-2.7 2.9,2.7, body extent -2.88,-2.7 2.88,2.7, height 2.29
DRV8825 [mm] "TSOP, 28-Leads, Body 9.70x4.40mm, Pitch 0.65mm, Thermal Pad 5.22.2x3.10.2mm, IPC Medium Density"
  oval 1.7x0.35 smd: 1(-2.85,4.225) 2(-2.85,3.575) 3(-2.85,2.925) 4(-2.85,2.275) 5(-2.85,1.625) 6(-2.85,0.975) 7(-2.85,0.325) 8(-2.85,-0.325) 9(-2.85,-0.975) 10(-2.85,-1.625) 11(-2.85,-2.275) 12(-2.85,-2.925) 13(-2.85,-3.575) 14(-2.85,-4.225) 15(2.85,-4.225) 16(2.85,-3.575) 17(2.85,-2.925) 18(2.85,-2.275) 19(2.85,-1.625) 20(2.85,-0.975) 21(2.85,-0.325) 22(2.85,0.325) 23(2.85,0.975) 24(2.85,1.625) 25(2.85,2.275) 26(2.85,2.925) 27(2.85,3.575) 28(2.85,4.225)
  rect 3.1x5.22 smd: 29(0,0)
  silkscreen extent -2.97,-4.9 1.6,5.07, body extent -2.25,-4.9 2.25,4.9, height 1.2
F1210_M [mm] "Bournes PTC Fuse"
  rect 1x2.5 smd: 1(-1.5,0) 2(1.5,0)
  silkscreen extent -0.4,-1.3 0.4,1.3, body extent -1.7,-1.35 1.7,1.4, height 0.85
HDR1X2 [mm] "Connector; Header; 2 Position"
  rect 1.5x1.5 hole 0.9: 1(0,0)
  round 1.5 hole 0.9: 2(2.54,0)
  silkscreen extent -1.27,-1.27 3.81,1.27
HDR1X3 [mm] "Connector; Header; 3 Position"
  rect 1.5x1.5 hole 0.9: 1(0,0)
  round 1.5 hole 0.9: 2(2.54,0) 3(5.08,0)
  silkscreen extent -1.27,-1.27 6.35,1.27
HDR1X5 [mm] "Connector; Header; 5 Position"
  rect 1.5x1.5 hole 0.9: 1(0,0)
  round 1.5 hole 0.9: 2(2.54,0) 3(5.08,0) 4(7.62,0) 5(10.16,0)
  silkscreen extent -1.27,-1.27 11.43,1.27
IRLML6346 [mm] "SOT23, 3-Leads, Body 2.92x2.37mm, Pitch 0.95mm, IPC Medium Density"
  rect 1.6x0.6 smd: 1(-0.9,0.95) 2(-0.9,-0.95) 3(0.9,0)
  silkscreen extent -1.02,-1.5 0.7,1.92, body extent -0.7,-1.52 0.7,1.52, height 1.12
J1-0603 [mm] "Chip Resistor, Body 1.6x0.8mm, IPC High Density"
  rect 0.7x0.9 smd: 1(-0.75,0) 2(0.75,0)
  silkscreen extent -0.2,-0.35 0.2,0.35, body extent -0.85,-0.48 0.85,0.48, height 0.9
LQFP144_N [mm] "Thin QFP, 144-Leads, Body 20x20mm, Pitch 0.5mm, IPC Medium Density"
  oval 1.8x0.3 smd: 1(-10.55,8.75) 2(-10.55,8.25) 3(-10.55,7.75) 4(-10.55,7.25) 5(-10.55,6.75) 6(-10.55,6.25) 7(-10.55,5.75) 8(-10.55,5.25) 9(-10.55,4.75) 10(-10.55,4.25) 11(-10.55,3.75) 12(-10.55,3.25) 13(-10.55,2.75) 14(-10.55,2.25) 15(-10.55,1.75) 16(-10.55,1.25) 17(-10.55,0.75) 18(-10.55,0.25) 19(-10.55,-0.25) 20(-10.55,-0.75) 21(-10.55,-1.25) 22(-10.55,-1.75) 23(-10.55,-2.25) 24(-10.55,-2.75) 25(-10.55,-3.25) 26(-10.55,-3.75) 27(-10.55,-4.25) 28(-10.55,-4.75) 29(-10.55,-5.25) 30(-10.55,-5.75) 31(-10.55,-6.25) 32(-10.55,-6.75) 33(-10.55,-7.25) 34(-10.55,-7.75) 35(-10.55,-8.25) 36(-10.55,-8.75) 73(10.55,-8.75) 74(10.55,-8.25) 75(10.55,-7.75) 76(10.55,-7.25) 77(10.55,-6.75) 78(10.55,-6.25) 79(10.55,-5.75) 80(10.55,-5.25) 81(10.55,-4.75) 82(10.55,-4.25) 83(10.55,-3.75) 84(10.55,-3.25) 85(10.55,-2.75) 86(10.55,-2.25) 87(10.55,-1.75) 88(10.55,-1.25) 89(10.55,-0.75) 90(10.55,-0.25) 91(10.55,0.25) 92(10.55,0.75) 93(10.55,1.25) 94(10.55,1.75) 95(10.55,2.25) 96(10.55,2.75) 97(10.55,3.25) 98(10.55,3.75) 99(10.55,4.25) 100(10.55,4.75) 101(10.55,5.25) 102(10.55,5.75) 103(10.55,6.25) 104(10.55,6.75) 105(10.55,7.25) 106(10.55,7.75) 107(10.55,8.25) 108(10.55,8.75)
  oval 0.3x1.8 smd: 37(-8.75,-10.55) 38(-8.25,-10.55) 39(-7.75,-10.55) 40(-7.25,-10.55) 41(-6.75,-10.55) 42(-6.25,-10.55) 43(-5.75,-10.55) 44(-5.25,-10.55) 45(-4.75,-10.55) 46(-4.25,-10.55) 47(-3.75,-10.55) 48(-3.25,-10.55) 49(-2.75,-10.55) 50(-2.25,-10.55) 51(-1.75,-10.55) 52(-1.25,-10.55) 53(-0.75,-10.55) 54(-0.25,-10.55) 55(0.25,-10.55) 56(0.75,-10.55) 57(1.25,-10.55) 58(1.75,-10.55) 59(2.25,-10.55) 60(2.75,-10.55) 61(3.25,-10.55) 62(3.75,-10.55) 63(4.25,-10.55) 64(4.75,-10.55) 65(5.25,-10.55) 66(5.75,-10.55) 67(6.25,-10.55) 68(6.75,-10.55) 69(7.25,-10.55) 70(7.75,-10.55) 71(8.25,-10.55) 72(8.75,-10.55) 109(8.75,10.55) 110(8.25,10.55) 111(7.75,10.55) 112(7.25,10.55) 113(6.75,10.55) 114(6.25,10.55) 115(5.75,10.55) 116(5.25,10.55) 117(4.75,10.55) 118(4.25,10.55) 119(3.75,10.55) 120(3.25,10.55) 121(2.75,10.55) 122(2.25,10.55) 123(1.75,10.55) 124(1.25,10.55) 125(0.75,10.55) 126(0.25,10.55) 127(-0.25,10.55) 128(-0.75,10.55) 129(-1.25,10.55) 130(-1.75,10.55) 131(-2.25,10.55) 132(-2.75,10.55) 133(-3.25,10.55) 134(-3.75,10.55) 135(-4.25,10.55) 136(-4.75,10.55) 137(-5.25,10.55) 138(-5.75,10.55) 139(-6.25,10.55) 140(-6.75,10.55) 141(-7.25,10.55) 142(-7.75,10.55) 143(-8.25,10.55) 144(-8.75,10.55)
  silkscreen extent -10.67,-9.25 9.25,9.57, body extent -10,-10 10,10, height 1.6
MAXM-S8+4_N [mm] "SOIC, 8-Leads, Body 4.9x3.9mm, Pitch 1.27mm, IPC Medium Density"
  oval 2.2x0.6 smd: 1(-2.4,1.905) 2(-2.4,0.635) 3(-2.4,-0.635) 4(-2.4,-1.905) 5(2.4,-1.905) 6(2.4,-0.635) 7(2.4,0.635) 8(2.4,1.905)
  silkscreen extent -2.52,-2.5 0.9,2.88, body extent -2,-2.5 2,2.5, height 1.75
MIC24085-AYML [mm] "QFN, 16-Leads, Body 3.25x3.25mm, Pitch 0.50mm, Thermal Pad 1.73x1.73mm, IPC Medium Density"
  oval 0.8x0.25 smd: 1(-1.7,0.75) 2(-1.7,0.25) 3(-1.7,-0.25) 4(-1.7,-0.75) 9(1.7,-0.75) 10(1.7,-0.25) 11(1.7,0.25) 12(1.7,0.75)
  oval 0.25x0.8 smd: 5(-0.75,-1.7) 6(-0.25,-1.7) 7(0.25,-1.7) 8(0.75,-1.7) 13(0.75,1.7) 14(0.25,1.7) 15(-0.25,1.7) 16(-0.75,1.7)
  rect 1.73x1.73 smd: 17(0,0)
  silkscreen extent -2.68,-1.9 1.9,1.9, body extent -1.75,-1.75 1.75,1.75, height 0.85
MSTBV4 [mil]
  oval 165x82.5 hole 55: 1(0,700) 2(0,500) 3(0,300) 4(0,100) 5(0,-100) 6(0,-300) 7(0,-500) 8(0,-700)
  silkscreen extent -150,-825 180,825, body extent -150,-825 180,825, height 472
MSTBV6 [mil]
  oval 165x82.5 hole 55: 1(0,0) 2(0,-200) 3(0,-400) 4(0,-600) 5(0,-800) 6(0,-1000)
  silkscreen extent -150,-1125 180,125, body extent -150,-1125 180,125, height 472
"Panasonic VS B" [mm]
  rect 2.4x1 smd: 1(3.478,1.651) 2(0.078,1.651)
  silkscreen extent -0.05,0 3.55,3.3
"Panasonic VS C" [mm]
  rect 3x1.4 smd: 1(5.348,2.921) 2(0.748,2.921)
  silkscreen extent 0.05,0.22 6.05,5.62, body extent 0.1,0.29 6,5.59, height 5.41
"Panasonic VS D" [mm]
  rect 3.4x1.4 smd: 1(2.6,0) 2(-2.6,0)
  silkscreen extent -3,-3.2 3,3.2, body extent -3.5,-3.3 3.5,3.3, height 5.4
PIN1 [mm] "Connector; Plug"
  rect 1.5x1.5 hole 0.9: 1(0,0)
  silkscreen extent -1.4,-1.4 1.4,2.17
PMEG1030EH_EJ [mm] "Molded Diode, 2-Leads, Body 2.60x1.60mm, IPC Medium Density"
  rect 1.3x0.65 smd: 1(-1.225,0) 2(1.225,0)
  silkscreen extent -1.4,-0.85 1.85,0.85, body extent -1.35,-0.85 1.35,0.85, height 1.2
PN61729 [mil]
  oct 66x66 hole 38: 1(50,186) 2(-49.21,186) 3(-49.21,107) 4(50,107)
  round 130.5 hole 87: 5(-236.22,0) 6(237,0)
  silkscreen extent -232,-400 233,221, body extent -237,-405 238,226, height 406
PSMN7R0-60YS [mm] "TO, 5-Pads, Body 5.15x5.86mm (max), IPC Medium Density"
  rect 1.8x0.6 smd: 1(-2.6,1.905) 2(-2.6,0.635) 3(-2.6,-0.635) 4(-2.6,-1.905)
  rect 4.8x4.5 smd: 5(1.14,0)
  silkscreen extent -2.72,2.63 -2.48,2.88, body extent -1.85,-2.5 2.25,2.5, height 1.2
Resistor2512 [mm]
  rect 1.6x3.1 smd: 1(-3.25,0) 2(3.25,0)
  silkscreen extent -2.26,-1.3 2.26,1.3, body extent -3.24,-1.4 3.24,1.4, height 0.9
RGT16-1700X1700TP [mm] "QFN, 16-Leads, Body 3x3mm, Pitch 0.5mm, Thermal Pad 1.7x1.7mm, TI Recommended"
  oval 0.85x0.28 smd paste-0.025 mask+0.07: 1(-1.475,0.75) 2(-1.475,0.25) 3(-1.475,-0.25) 4(-1.475,-0.75) 9(1.475,-0.75) 10(1.475,-0.25) 11(1.475,0.25) 12(1.475,0.75)
  oval 0.28x0.85 smd paste-0.025 mask+0.07: 5(-0.75,-1.475) 6(-0.25,-1.475) 7(0.25,-1.475) 8(0.75,-1.475) 13(0.75,1.475) 14(0.25,1.475) 15(-0.25,1.475) 16(-0.75,1.475)
  rect 1.7x1.7 smd paste-0.85 mask+0.07: 17(0,0)
  silkscreen extent -2.5,-1.73 1.73,1.73, body extent -1.57,-1.57 1.58,1.58, height 1
S9015E-05-ND [mm] "10 Pin Cortex JTAG Debug Header"
  round 1.1 hole 0.508: 1(5.08,0) 2(5.08,-1.27) 3(3.81,0) 4(3.81,-1.27) 5(2.54,0) 6(2.54,-1.27) 7(1.27,0) 8(1.27,-1.27) 9(0,0) 10(0,-1.27)
  round 0.5 on Top Overlay: 1(7,0.8)
  silkscreen extent -1.25,-2.5 6.5,1.25
SK310A-TP [mm] "Molded Diode, 2-Leads, Body 4.31x2.69mm, IPC Medium Density"
  rect 2.3x2.15 smd: 1(-1.625,0) 2(1.625,0)
  silkscreen extent -2.3,-1.45 3.07,1.75, body extent -2.29,-1.42 2.28,1.42, height 2.95
"SM 0805 - gap trimmed" [mm]
  rect 1x1.5 smd: 1(-1.1,0) 2(1.1,0)
  silkscreen extent -0.36,-0.64 0.35,0.63
"SM 0805 polarized" [mm]
  rect 1x1.5 smd: 1(0.93,-1.105) 2(3.13,-1.105)
  silkscreen extent 0.1,-1.9 2.38,-0.3
SZMM3Z4V7T1G [mm] "Molded Diode, 2-Leads, Body 1.70x1.25mm, IPC Medium Density"
  rect 0.9x0.35 smd: 1(-1,0) 2(1,0)
  silkscreen extent -0.95,-0.7 1.4,0.7, body extent -0.9,-0.67 0.9,0.67, height 1
TL3301 [mm]
  rect 1.4x2.1 smd: 1(-2.3,-4.5) 1(-2.3,4.5) 2(2.3,-4.5) 2(2.3,4.5)
  silkscreen extent -2.2,-2.4 2.2,2.4
VLS252012T-2R2M1R3 [mm] "Precision Wire Wound Inductor, 2-Leads, Body 2.5x2.0mm, IPC Medium Density"
  rect 1.65x2.1 smd: 1(-1.025,0) 2(1.025,0)
  body extent -1.3,-1.05 1.3,1.05, height 1.2

## Part data
1 kRESET TRST1: "Header, 2-Pin"
C1_EndstopChannel1 C1_EndstopChannel2 C1_EndstopChannel3 C2_EndstopChannel1 C2_EndstopChannel2 C2_EndstopChannel3 C4 C5 C6 C9 C14 C15 C17 C18 C19 C20 C21 C22 C23 C24 C25 C26 C29 C32 C33 C34 C35 C36 C37 C38 C39 C40 C41 C42 C43 C44 C45 C46 C47 C48 C49 C50 C51 C52 C54 C55 C56 C57 C58 C59 C64 C65 C66_DriverChannelDRV88251 C66_DriverChannelDRV88252 C66_DriverChannelDRV88253 C66_DriverChannelDRV88254 C66_DriverChannelDRV88255 C68_DriverChannelDRV88251 C68_DriverChannelDRV88252 C68_DriverChannelDRV88253 C68_DriverChannelDRV88254 C68_DriverChannelDRV88255 C71_DriverChannelDRV88251 C71_DriverChannelDRV88252 C71_DriverChannelDRV88253 C71_DriverChannelDRV88254 C71_DriverChannelDRV88255: library part "Cap Semi", "Capacitor (Semiconductor SIM Model)"
C3 C12 C16 C69_DriverChannelDRV88251 C69_DriverChannelDRV88252 C69_DriverChannelDRV88253 C69_DriverChannelDRV88254 C69_DriverChannelDRV88255 C70_DriverChannelDRV88251 C70_DriverChannelDRV88252 C70_DriverChannelDRV88253 C70_DriverChannelDRV88254 C70_DriverChannelDRV88255: library part "Cap Pol1", "Polarized Capacitor (Radial)"
C7 C8 C10 C11 C30_ThermistorChannel1 C30_ThermistorChannel2 C31_ThermocoupleChannel1 C31_ThermocoupleChannel2 C60 C61 C62 C63: "Capacitor (Semiconductor SIM Model)"
D1: library part "D Zener", "Zener Diode"
D4 D6 D8 D12 D15 D17 D19: library part "D Schottky", "Schottky Diode"
D5: "Default Diode"
D7 D9: "Typical RED, GREEN, YELLOW, AMBER GaAs LED"
D10 D11 D13 D14 D16 D18: "Typical RED GaAs LED"
D11_ThermistorChannel1 D11_ThermistorChannel2 D12_ThermistorChannel1 D12_ThermistorChannel2: "High Conductance Fast Diode"
F1 F2 F3 F4: library part "Fuse 1", "Fuse"
FB2 FB3 FB4 FB9 L2: library part Inductor, "Inductor"
FETS: library part con-phoenix-508
"Logic Source1" SPD1: "Header, 3-Pin"
M1_DriverChannelDRV88251 M1_DriverChannelDRV88252 M1_DriverChannelDRV88253 M1_DriverChannelDRV88254 M1_DriverChannelDRV88255: library part "Molex 0705430003 Alt", "Molex 4 Pin Clip Connector"
MAX1_EndstopChannel1 MAX1_EndstopChannel2 MAX1_EndstopChannel3 MIN1_EndstopChannel1 MIN1_EndstopChannel2 MIN1_EndstopChannel3: library part "Molex Endstop"
P3_DriverChannelDRV88251 P3_DriverChannelDRV88252 P3_DriverChannelDRV88253 P3_DriverChannelDRV88254 P3_DriverChannelDRV88255: "Header, 5-Pin"
Q2 Q3 Q4 Q5 Q6 Q7: "N-Channel MOSFET"
R1 R7 R8 R9 R10 R11 R13_ThermistorChannel1 R13_ThermistorChannel2 R14_ThermistorChannel1 R14_ThermistorChannel2 R21 R23: "Resistor"
R2_EndstopChannel1 R2_EndstopChannel2 R2_EndstopChannel3 R3_EndstopChannel1 R3_EndstopChannel2 R3_EndstopChannel3 R12 R13 R14 R15 R16 R17 R18 R19 R20 R22 R24 R25 R26 R27 R28 R29 R30_DriverChannelDRV88251 R30_DriverChannelDRV88252 R30_DriverChannelDRV88253 R30_DriverChannelDRV88254 R30_DriverChannelDRV88255 R32_DriverChannelDRV88251 R32_DriverChannelDRV88252 R32_DriverChannelDRV88253 R32_DriverChannelDRV88254 R32_DriverChannelDRV88255 R33_DriverChannelDRV88251 R33_DriverChannelDRV88252 R33_DriverChannelDRV88253 R33_DriverChannelDRV88254 R33_DriverChannelDRV88255 R37 R38 R45 R46 R47 R48 R52 R55 R56 R57 R58 R59 R60 R61 R62 R63 R64 R65 R66 R67 R68 R69 R70 R71: library part Res3, "Resistor"
THM_TP1_ThermistorChannel1 THM_TP1_ThermistorChannel2: library part Socket, "Socket"
U2: "Buck Step Down Regulator with 3 to 17 V Input and 3.3 V Output, -40 to 85 degC, 16-Pin QFN (RGT), Green (RoHS & no Sb/Br)"
U4_ThermocoupleChannel1 U4_ThermocoupleChannel2: "Cold Junction Compensated Thermocouple to Digital Converter, 14 Bits Temperature Resolution, -40 to 125 degC, 8-Pin SOIC (S8+4), Pb-Free"
U5: library part ATML-ATSAM4EXEA-LQFP-144
U6: "USB Opto Isolator"
U7_DriverChannelDRV88251 U7_DriverChannelDRV88252 U7_DriverChannelDRV88253 U7_DriverChannelDRV88254 U7_DriverChannelDRV88255: "DRV8825 Ti Stepper Driver"
U10: library part "A3944 - MOSFET Low Side Driver", "Allegro Micro A3944 MOST Driver (low side)"
X2: library part XTAL, "Crystal Oscillator"

## Free pads (board coordinates)
  rect 3.81x3.81 hole 2.54: ""(13.208,3.302) ""(13.208,108.458) ""(149.098,3.302) ""(149.098,108.458)

## Via types
v1: diameter 0.635, hole 0.381, Top Layer to Bottom Layer, 336 vias
v2: diameter 0.762, hole 0.381, Top Layer to Bottom Layer, 305 vias
v3: diameter 0.5, hole 0.2, Top Layer to Bottom Layer, 90 vias
v4: diameter 1.27, hole 0.508, Top Layer to Bottom Layer, 15 vias
v5: diameter 0.762, hole 0.508, Top Layer to Bottom Layer, 3 vias
v6: diameter 1.27, hole 0.711, Top Layer to Bottom Layer, 1 vias